# Altium PCB SoM BaseBoard Limbotics Prototype V0PcbDoc.PcbDoc (part 1 of 2)
Units mil, origin at the board's own origin, x right, y up, seen from the top; angles counter-clockwise.
Board outline 5680 x 2228.35 mil, 4 copper layers (Top Layer, GND, PWR, Bottom Layer), stack 61.811 mil thick; 127 components, 192 nets, 673 pads, 249 vias.
Unrouted connection lines stored in the file: 126.
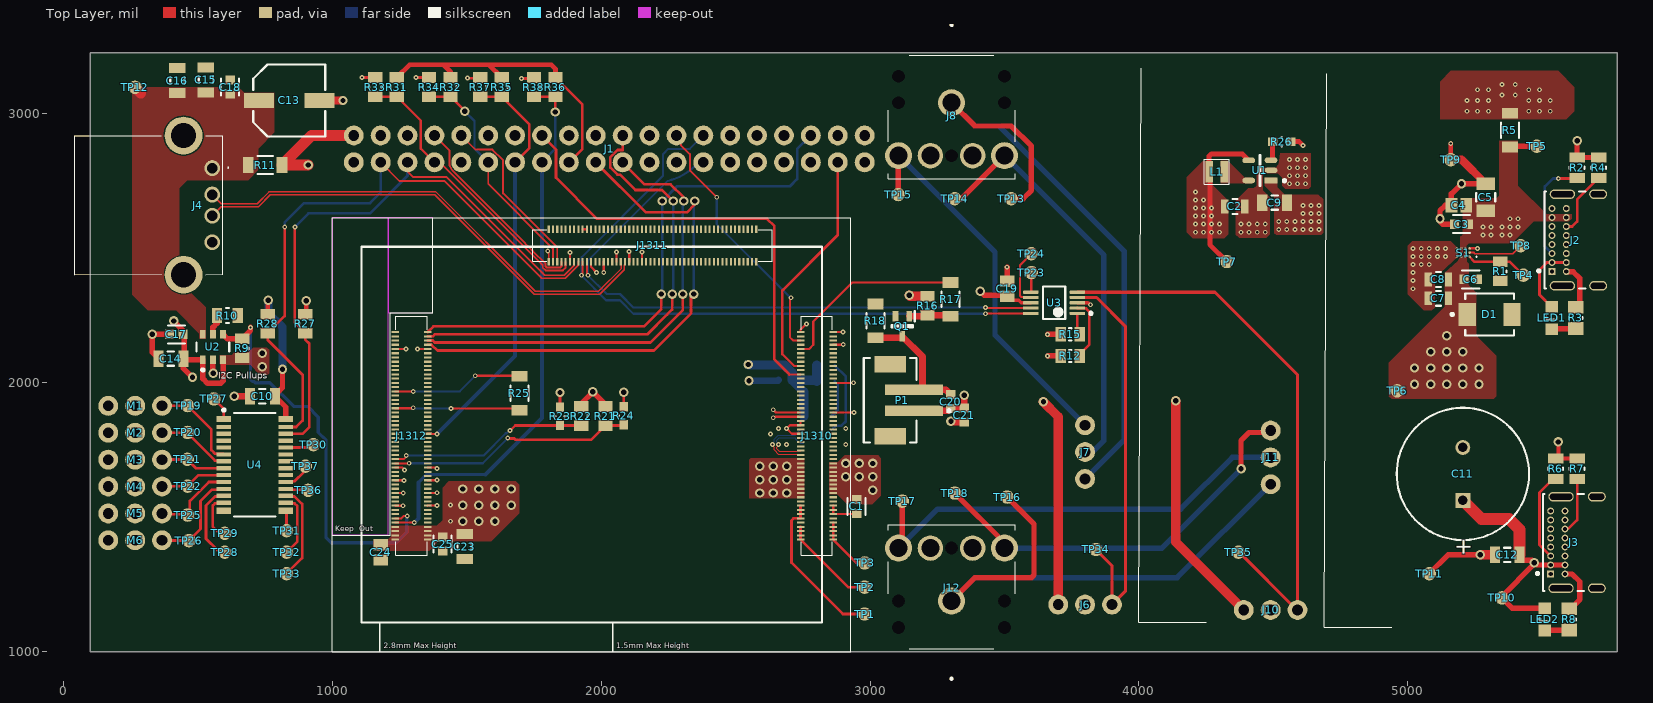
[diagram p0: Top Layer view]
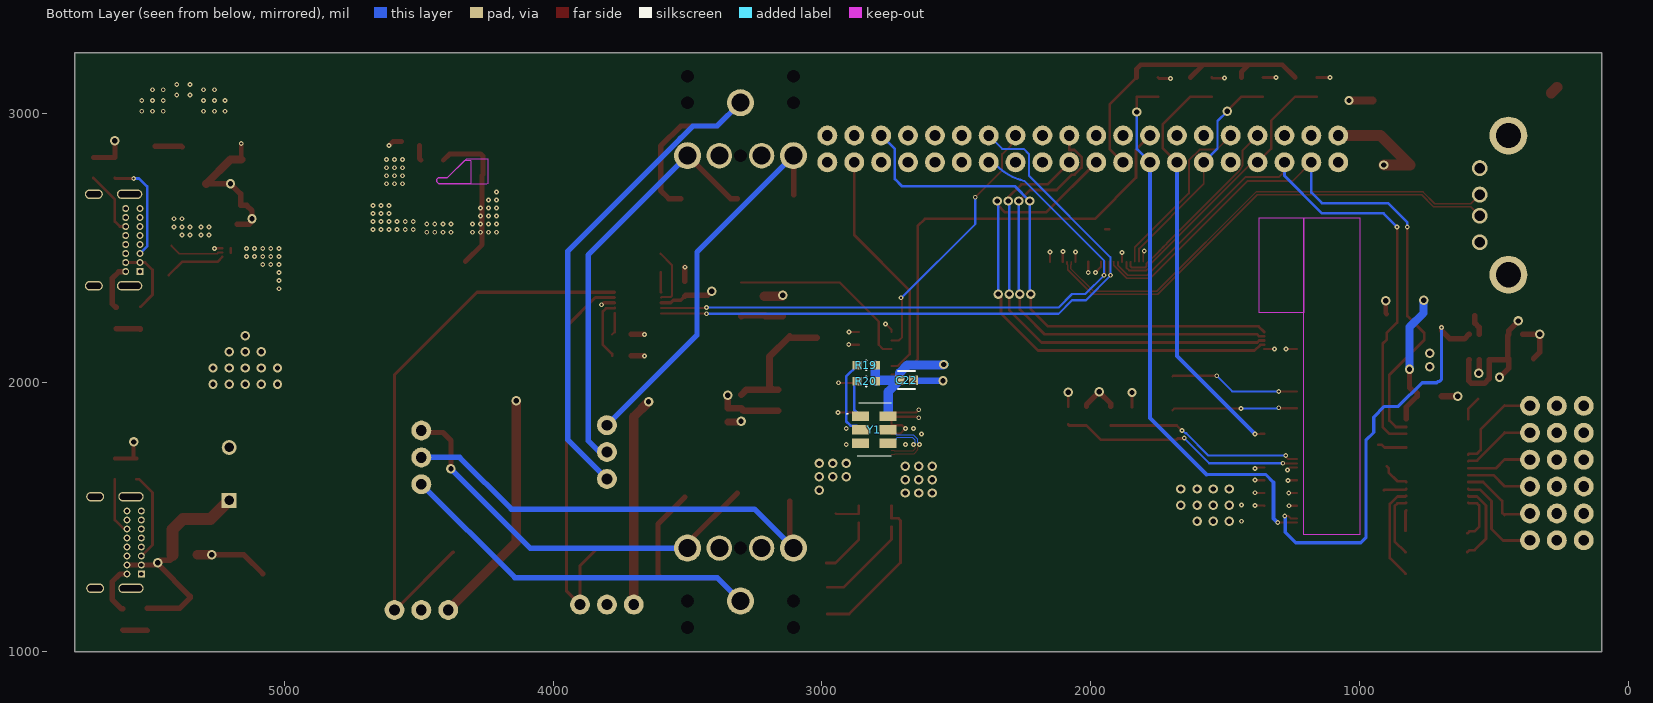
[diagram p1: Bottom Layer view, seen from below]
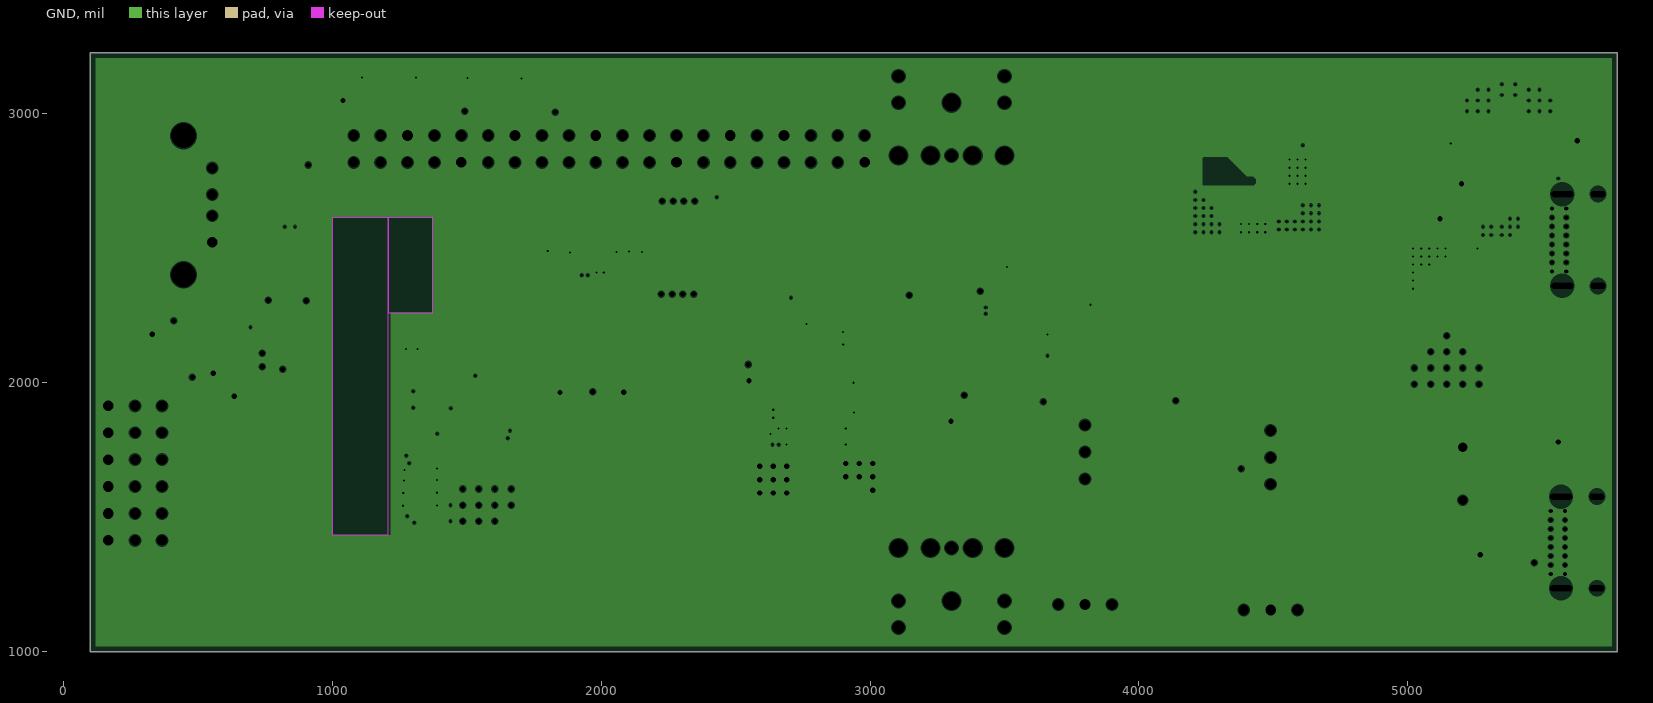
[diagram p2: GND, clearances drawn from the general rule]
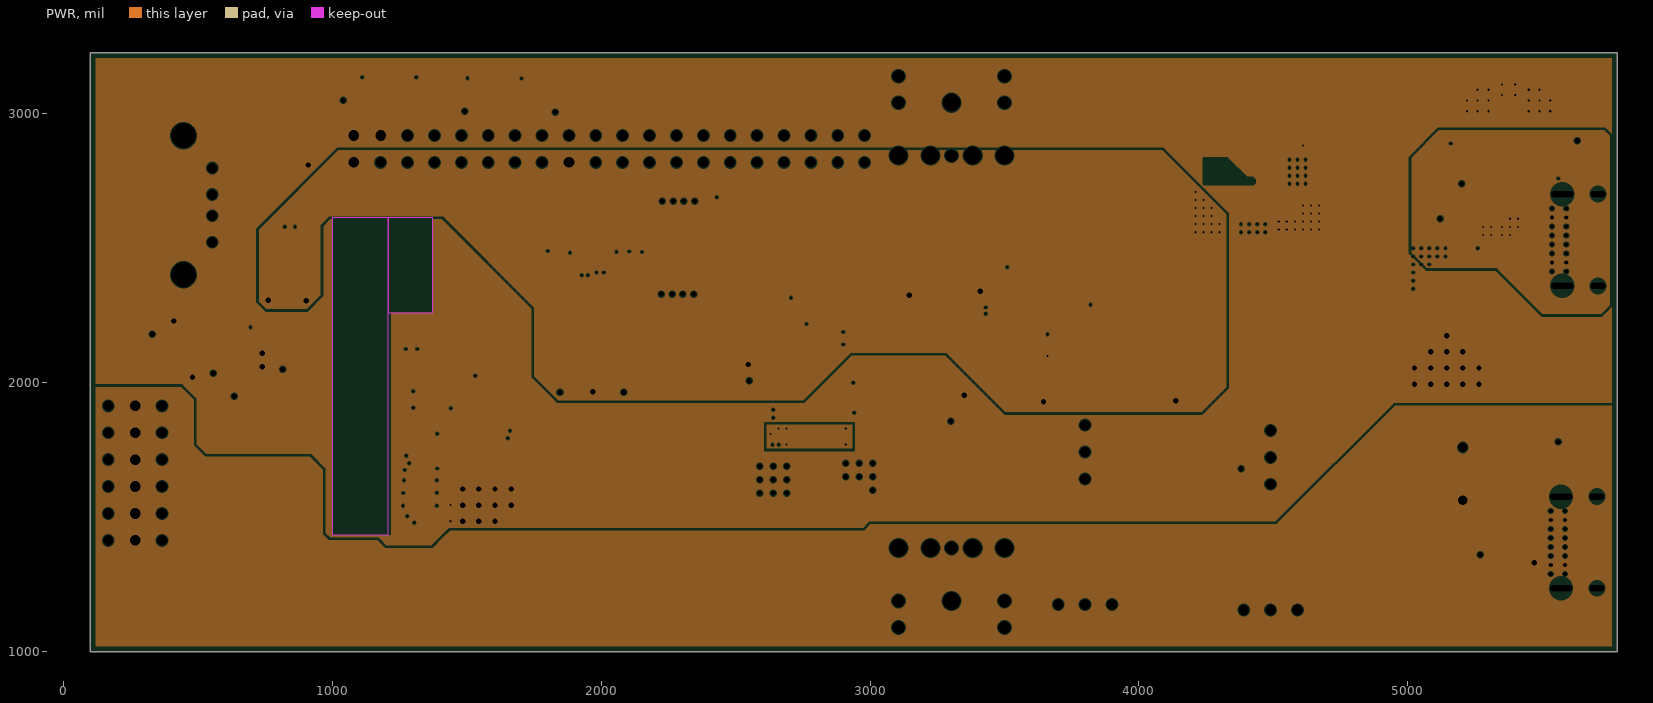
[diagram p3: PWR, clearances drawn from the general rule]
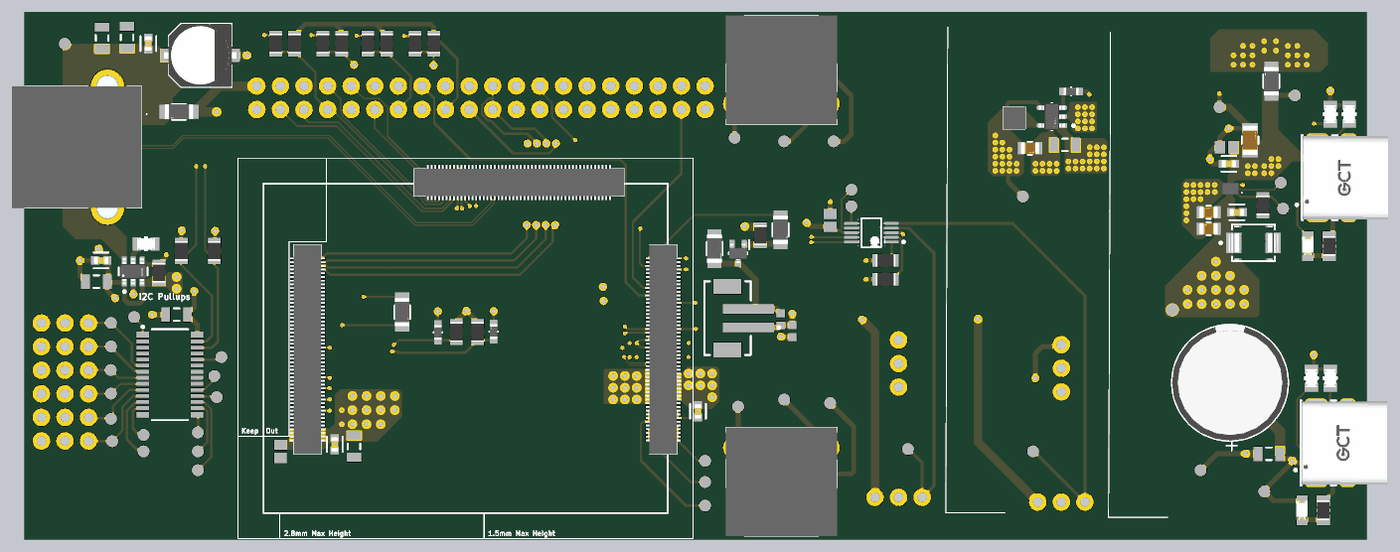
[diagram p5: 3D render of the assembled board from above, using the file's embedded part models]
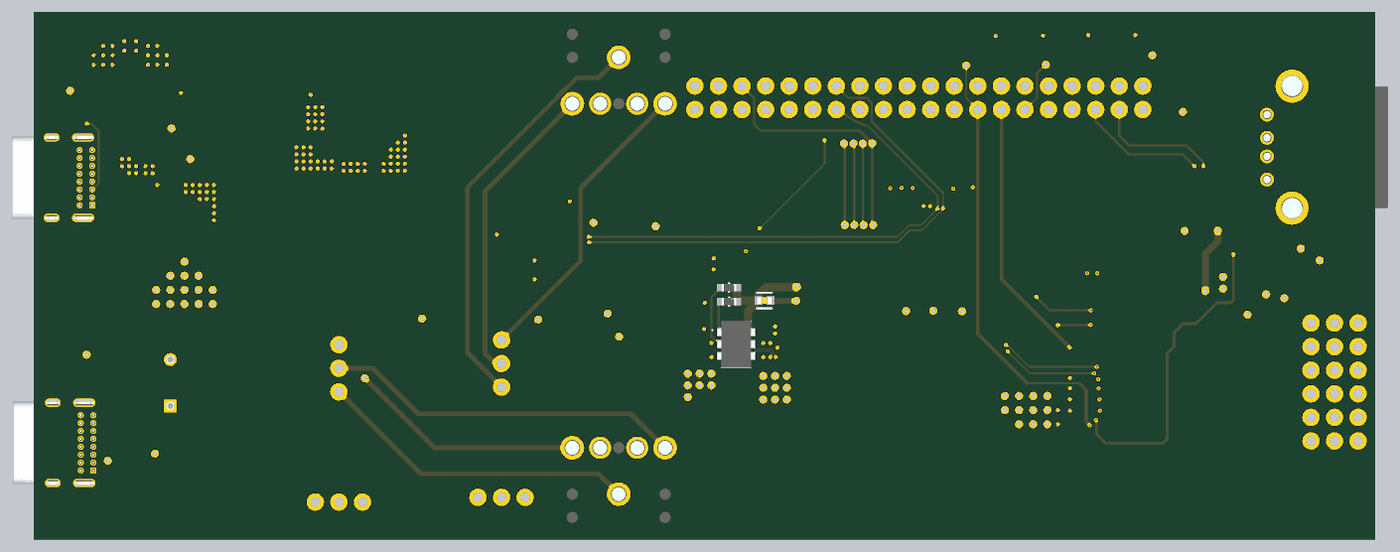
[diagram p6: 3D render of the assembled board from below, using the file's embedded part models]

## Layer stack, top to bottom
Top Solder: solder mask 0.5, Solder Resist, Dk 3.8
Top Layer: signal copper 1.378
Dielectric 1: prepreg 3.937, 2313, Dk 4.05
GND: plane copper 0.689, net GND
Core: core 49.803, FR-4, Dk 4.5
PWR: plane copper 0.689, net (Multiple Nets)
Dielectric 2: prepreg 3.937, 2313, Dk 4.05
Bottom Layer: signal copper 1.378
Bottom Solder: solder mask 0.5, Solder Resist, Dk 3.8

## Board outline
100,1000 5780,1000 5780,3228.35 100,3228.35

## Design rules (kind name [scope] priority, off if disabled: settings)
BoardOutlineClearance [All] p1: gap=7.87 ignorepadtopadclearanceinfootprint=FALSE
Clearance [All] p1: gap=4 ignorepadtopadclearanceinfootprint=FALSE except(5: Arc-Via Track-Via SMDPad-Via THPad-Via Via-Via Via-Fill Via-Poly Via-Region Via-Text; 9.84: Arc-Hole Track-Hole SMDPad-Hole THPad-Hole Via-Hole Fill-Hole Poly-Hole Region-Hole Text-Hole)
ComponentClearance [All] p1: gap=4 collisioncheckmode=3 verticalgap=4 showdistances=TRUE
DiffPairsRouting DiffPairsRouting_1 [InDifferentialPair('HDMI_REFCLK')] p1: maxlimit=5 minlimit=5 mostfreqgap=5 toplayer_minwidth=4.51 toplayer_maxwidth=4.51 toplayer_prefwidth=4.51 bottomlayer_minwidth=4.51 bottomlayer_maxwidth=4.51 bottomlayer_prefwidth=4.51 impedanceprofiledriven=TRUE impedanceprofileid={F7E8DA80-146D-4729-9FA5-0A8441BEC04B} impedanceprofilevalue=100.000000 maxuncoupledlength=500
DiffPairsRouting DiffPairsRouting_USB [InDifferentialPair('USB2_D')] p2: maxlimit=5 minlimit=5 mostfreqgap=5 toplayer_minwidth=5.85 toplayer_maxwidth=5.85 toplayer_prefwidth=5.85 bottomlayer_minwidth=5.85 bottomlayer_maxwidth=5.85 bottomlayer_prefwidth=5.85 impedanceprofiledriven=TRUE impedanceprofileid={8456CD66-69F7-4E08-9A77-33F784F3C630} impedanceprofilevalue=90.000000 maxuncoupledlength=500
DiffPairsRouting [All] p3: maxlimit=4 minlimit=4 mostfreqgap=4 toplayer_minwidth=4 toplayer_maxwidth=71497.94 toplayer_prefwidth=4 bottomlayer_minwidth=4 bottomlayer_maxwidth=71497.94 bottomlayer_prefwidth=4 maxuncoupledlength=500
Height [All] p1: minheight=0 maxheight=71497.94 prefheight=500
HoleSize [All] p1: absolutevalues=TRUE maxlimit=248.03 minlimit=7.87 maxpercent=80.000 minpercent=20.000
HoleToHoleClearance [All] p1: gap=9.84 allowstackedmicrovias=FALSE
MinimumAnnularRing [All] p1: minimumring=3
MinimumSolderMaskSliver [All] p1: minsoldermaskwidth=0
PlaneClearance [All] p1: clearance=4
PlaneConnect PlaneConnectPowerPads [InPadClass('PowerPads')] p1: planeconnectstyle=Direct reliefexpansion=20 reliefentries=4 reliefconductorwidth=10 reliefairgap=10
PlaneConnect [All] p2: pad.planeconnectstyle=Relief pad.reliefexpansion=11.81 pad.reliefentries=4 pad.reliefconductorwidth=4 pad.reliefairgap=4 via.planeconnectstyle=Direct via.reliefexpansion=11.81 via.reliefentries=4 via.reliefconductorwidth=5 via.reliefairgap=5
PolygonConnect PolygonConnect_12 [All vs IsNamedPolygon('3V3 Clock Bottom')] p1: connectstyle=Direct reliefconductorwidth=10 reliefentries=4 polygonreliefangle="90 Angle" airgapwidth=10
PolygonConnect PolygonConnect_11 [All vs IsNamedPolygon('5VSYSFromInput')] p2: connectstyle=Direct reliefconductorwidth=10 reliefentries=4 polygonreliefangle="90 Angle" airgapwidth=10
PolygonConnect PolygonConnect_10 [All vs IsNamedPolygon('5VIN BYPASS')] p3: connectstyle=Direct reliefconductorwidth=10 reliefentries=4 polygonreliefangle="90 Angle" airgapwidth=10
PolygonConnect PolygonConnect_9 [All vs IsNamedPolygon('Top Layer-USB_5V_SoM')] p4: connectstyle=Direct reliefconductorwidth=10 reliefentries=4 polygonreliefangle="90 Angle" airgapwidth=10
PolygonConnect PolygonConnect_8 [All vs IsNamedPolygon('5VIN GND')] p5: connectstyle=Direct reliefconductorwidth=10 reliefentries=4 polygonreliefangle="90 Angle" airgapwidth=10
PolygonConnect PolygonConnect_7 [All vs IsNamedPolygon('USB5V_SOM')] p6: connectstyle=Direct reliefconductorwidth=10 reliefentries=4 polygonreliefangle="90 Angle" airgapwidth=10
PolygonConnect PolygonConnect_6 [All vs IsNamedPolygon('3V3 Out')] p7: connectstyle=Direct reliefconductorwidth=10 reliefentries=4 polygonreliefangle="90 Angle" airgapwidth=10
PolygonConnect PolygonConnect_5 [All vs IsNamedPolygon('3V3 Buck Reg GND')] p8: connectstyle=Direct reliefconductorwidth=10 reliefentries=4 polygonreliefangle="90 Angle" airgapwidth=10
PolygonConnect PolygonConnect_4 [All vs IsNamedPolygon('3V3 Buck Reg Vin-5VSYS')] p9: connectstyle=Direct reliefconductorwidth=10 reliefentries=4 polygonreliefangle="90 Angle" airgapwidth=10
PolygonConnect PolygonConnect_3 [All vs IsNamedPolygon('3V3 Buck Reg Vin-5VSYS')] p10: connectstyle=Direct reliefconductorwidth=10 reliefentries=4 polygonreliefangle="90 Angle" airgapwidth=10
PolygonConnect PolygonConnect_2 [All vs IsNamedPolygon('3V3 Buck Reg GND')] p11: connectstyle=Direct reliefconductorwidth=10 reliefentries=4 polygonreliefangle="90 Angle" airgapwidth=10
PolygonConnect PolygonConnect_1 [All vs IsNamedPolygon('3V3 Switch')] p12: connectstyle=Direct reliefconductorwidth=10 reliefentries=4 polygonreliefangle="90 Angle" airgapwidth=10
PolygonConnect PolygonConnectPowerPads [All vs (InPadClass('PowerPads'))] p13: connectstyle=Direct reliefconductorwidth=10 reliefentries=4 polygonreliefangle="90 Angle" airgapwidth=10
PolygonConnect [All] p14: connectstyle=Direct reliefconductorwidth=4 reliefentries=4 polygonreliefangle="90 Angle" airgapwidth=4
RoutingVias [All] p1: holewidth=7.87 width=17.72 viastyle="Through Hole" minholewidth=7.87 minwidth=17.72 maxholewidth=248.03 maxwidth=257.87
SilkToSilkClearance [All] p1: silktosilkclearance=0
SilkToSolderMaskClearance [IsPad] p1: minsilkscreentomaskgap=4 clearancetoexposedcopper=TRUE
SolderMaskExpansion [All] p1: expansion=2.95 istentingtop=FALSE
Width [All] p1: maxlimit=71497.94 minlimit=4 preferedwidth=10
20 further rules are at their usual default settings.

## Classes and differential pairs
component class "SoM - PullUp PullDown": R31 R32 R33 R34 R35 R36 R37 R38
component class SoM: C1 C20 C21 C22 C23 C24 C25 J1 J1310 J1311 J1312 P1 Q1 R16 R17 R18 R19 R20 R21 R22 R23 R24 R25 TP1 TP2 TP3 Y1
component class Power: C2 C3 C4 C5 C6 C7 C8 C9 C11 C12 D1 J2 J3 L1 LED1 LED2 R1 R2 R3 R4 R5 R6 R7 R8 R26 S1 TP4 TP5 TP6 TP7 TP8 TP9 TP10 TP11 U1
component class "Peripherals - USB": C13 C14 C15 C16 C17 C18 J4 R9 R10 R11 TP12 U2
component class "Peripherals - Servos": C10 M1 M2 M3 M4 M5 M6 R27 R28 TP19 TP20 TP21 TP22 TP25 TP26 TP27 TP28 TP29 TP30 TP31 TP32 TP33 TP36 TP37 U4
component class "Peripherals - MyoSensor": C19 J6 J7 J8 J10 J11 J12 R12 R15 TP13 TP14 TP15 TP16 TP17 TP18 TP23 TP24 TP34 TP35 U3
differential pair USB2_D: +USB2_D_P -USB2_D_N
differential pair HDMI_REFCLK: +HDMI_REFCLK_P -HDMI_REFCLK_N

## Components (designator, comment, footprint, x,y, rotation, side; value= is the part's Value field where it differs from the comment)
C1 "0.1uF" FP-C0603-CJ-MFG 2950,1540 r90 top value=100nF
C2 "22uF" FP-GRM21B-0_15-MFG 4357,2656 r0 top
C3 "0.1uF" FP-C0603-CJ-MFG 5200,2590 r180 top value=100nF
C4 "1uF" CAPC2013X145X50LL20T25 5190,2660 r0 top
C5 "47uF" FP-GRM31C-0_2-e0_3_0_8-IPC_C 5290,2690 r90 top
C6 "0.1uF" FP-C0603-CJ-MFG 5234.25,2384.25 r0 top value=100nF
C7 "22uF" FP-GRM21B-0_15-MFG 5114.25,2314.25 r180 top
C8 "22uF" FP-GRM21B-0_15-MFG 5114.25,2384.25 r180 top
C9 "10uF" CAPC2013X145X20ML20 4505,2670 r0 top
C10 "10uF" CAPC2013X145X20ML20 740,1950 r0 top
C11 "100uF * n" CAPPR65-500-2000X1250X2200 5205,1661.06 r90 top
C12 "10uF" CAPC2013X145X20ML20 5370,1360 r0 top
C13 "100uF" PNSC-EEEFK1C101P_L 840,3050 r0 top
C14 "10uF" CAPC2013X145X20ML20 400,2090 r0 top
C15 "10uF" CAPC2013X145X20ML20 530,3126.26 r270 top
C16 "10uF" CAPC2013X145X20ML20 423.86,3123.9 r270 top
C17 "0.1uF" FP-C0603-CJ-MFG 420,2180 r180 top value=100nF
C18 "0.1uF" FP-C0603-CJ-MFG 620,3100 r90 top value=100nF
C19 "1uF" CAPC2013X145X50LL20T25 3510,2350 r270 top
C20 "1nF 0603" CAPC1608X90X35LL15T15 3300,1930 r270 top
C21 "1nF 0603" CAPC1608X90X35LL15T15 3350,1880 r270 top
C22 "0.1uF" FP-C0603-CJ-MFG 2685,2010 r0 bottom value=100nF
C23 "10uF" CAPC2013X145X20ML20 1492,1391 r90 top
C24 "1uF" CAPC2013X145X50LL20T25 1180,1370 r90 top
C25 "0.1uF" FP-C0603-CJ-MFG 1410,1400 r90 top value=100nF
D1 "SMBJ5.0A-TR" FP-SMB-MFG 5304.25,2254.25 r0 top
J1 "210-P92-20GBEG" 2X20 1080,2820 r0 top locked
J2 "USB4085-GF-A" FP-USB4085-GF-A-MFG 5695,2531.06 r90 top
J3 "USB4085-GF-A" FP-USB4085-GF-A-MFG 5690,1406.06 r90 top
J4 "87520-0010BLF" 875200010BLF 553.54,2798.43 r270 top
J6 "0.1 1x3 Header" 1X03 3900,1175 r180 top
J7 "0.1 1x3 Header" 1X03 3800,1842.5 r270 top
J8 "SJ1-3523N" SJ13523N 3303.15,3218.74 r270 top
J10 "0.1 1x3 Header" 1X03 4590,1155 r180 top
J11 "0.1 1x3 Header" 1X03 4490,1822.5 r270 top
J12 "SJ1-3523N" SJ13523N 3303.15,1011.26 r90 top
J1310 "DF40HC(3.0)-100DS-0.4V(51)" DF40HC30100DS04V51 2802.36,1802.76 r90 top locked
J1311 "DF40HC(3.0)-100DS-0.4V(51)" DF40HC30100DS04V51 2190.94,2510.63 r0 top locked
J1312 "DF40HC(3.0)-100DS-0.4V(51)" DF40HC30100DS04V51 1294.49,1802.76 r90 top locked
L1 "2.2uH 1.7A" NRH2412T2R2MNGH 4289.6,2784.85 r180 top
LED1 "redLED" 0805_A 5535,2241.06 r90 top
LED2 "greenLED" 0805_A 5510,1120 r90 top
M1 "Servo Motor" 1X03 366.83,1914.17 r180 top
M2 "Servo Motor" 1X03 366.83,1814.17 r180 top
M3 "Servo Motor" 1X03 366.83,1714.17 r180 top
M4 "Servo Motor" 1X03 366.83,1614.17 r180 top
M5 "Servo Motor" 1X03 366.83,1514.17 r180 top
M6 "Servo Motor" 1X03 366.83,1414.17 r180 top
P1 "B2B-PH-SM4-TB(LF)(SN)" JST-B2B-PH-SM4-TB-2_V 3075,1935 r270 top
Q1 "PMF250XNEX" SOT65P210X110-3N 3120,2210 r270 top
R1 "10kR" RESC2013X60X35NL10T20 5344.25,2414.25 r270 top
R2 "5.1kR" FP-CRCW0805-e3-MFG 5630,2800 r270 top
R3 "10kR" RESC2013X60X35ML10T20 5625,2241.06 r270 top
R4 "5.1kR" FP-CRCW0805-e3-MFG 5710,2800 r270 top
R5 "DNP 0R" FP-RC1206-MFG 5380,2940 r90 top value=0Ω
R6 "5.1kR" FP-CRCW0805-e3-MFG 5550,1680 r270 top
R7 "5.1kR" FP-CRCW0805-e3-MFG 5630,1680 r270 top
R8 "10kR" RESC2013X60X35ML10T20 5600,1120 r270 top
R9 "10kR" RESC2013X60X35NL10T20 665,2127.83 r270 top
R10 "20kR" FP-CRCW0805-e3-MFG 610,2250 r180 top
R11 "DNP 0R" FP-RC1206-MFG 750,2810 r180 top value=0Ω
R12 "10kR" RESC2013X60X35NL10T20 3745,2100 r180 top
R15 "10kR" RESC2013X60X35NL10T20 3745,2180 r0 top
R16 "10kR" RESC2013X60X35NL10T20 3214.01,2287.03 r270 top
R17 "0R" FP-RC1206-MFG 3300,2310 r270 top value=0Ω
R18 "DNP 0R" FP-RC1206-MFG 3020,2230 r270 top value=0Ω
R19 "100kR" FP-RC0603-0_55-MFG 2835,2065 r180 bottom
R20 "100kR" FP-RC0603-0_55-MFG 2835,2005 r180 bottom
R21 "10kR DNP" RESC2013X60X35NL10T20 2016,1876.43 r270 top
R22 "10kR" RESC2013X60X35NL10T20 1926,1876.43 r270 top
R23 "100kR DNP" FP-RC0603-0_55-MFG 1847,1875 r90 top
R24 "100kR DNP" FP-RC0603-0_55-MFG 2084,1878 r90 top
R25 "0R" FP-RC1206-MFG 1696,1961 r270 top value=0Ω
R26 "100kR" FP-RC0603-0_55-MFG 4531,2897 r0 top
R27 "10kR_DNP" RESC2013X60X35NL10T20 900,2220 r270 top
R28 "10kR_DNP" RESC2013X60X35NL10T20 760,2220 r270 top
R31 "DNP 10kR" RESC2013X60X35NL10T20 1240,3100 r270 top
R32 "DNP 10kR" RESC2013X60X35NL10T20 1440,3100 r270 top
R33 "DNP 10kR" RESC2013X60X35NL10T20 1160,3100 r90 top
R34 "DNP 10kR" RESC2013X60X35NL10T20 1360,3100 r90 top
R35 "DNP 10kR" RESC2013X60X35NL10T20 1630,3100 r270 top
R36 "DNP 10kR" RESC2013X60X35NL10T20 1830,3100 r270 top
R37 "DNP 10kR" RESC2013X60X35NL10T20 1550,3100 r90 top
R38 "DNP 10kR" RESC2013X60X35NL10T20 1750,3100 r90 top
S1 "KTS1681AEUZ-TR" KTS1681AEUZTR 5230,2468.5 r180 top
TP1 "TestPad" TestPad50mil 2980,1140 r270 top
TP2 "TestPad" TestPad50mil 2980,1240 r270 top
TP3 "TestPad" TestPad50mil 2980,1330 r90 top
TP4 "TestPad" TestPad50mil 5430,2400 r270 top
TP5 "TestPad" TestPad50mil 5480,2880 r270 top
TP6 "TestPad" TestPad50mil 4960.58,1970.21 r270 top
TP7 "TestPad" TestPad50mil 4327,2451 r180 top
TP8 "TestPad" TestPad50mil 5420,2510 r270 top
TP9 "TestPad" TestPad50mil 5160,2830 r180 top
TP10 "TestPad" TestPad50mil 5350,1200 r180 top
TP11 "TestPad" TestPad50mil 5080,1290 r180 top
TP12 "TestPad" TestPad50mil 266,3099 r270 top
TP13 "TestPad" TestPad50mil 3525,2685 r180 top
TP14 "TestPad" TestPad50mil 3315,2685 r180 top
TP15 "TestPad" TestPad50mil 3105,2700 r180 top
TP16 "TestPad" TestPad50mil 3510,1575 r180 top
TP17 "TestPad" TestPad50mil 3120,1560 r180 top
TP18 "TestPad" TestPad50mil 3315,1590 r180 top
TP19 "TestPad" TestPad50mil 461.83,1915.24 r180 top
TP20 "TestPad" TestPad50mil 461.83,1815.24 r180 top
TP21 "TestPad" TestPad50mil 460.83,1715.24 r180 top
TP22 "TestPad" TestPad50mil 461.83,1615.24 r180 top
TP23 "TestPad" TestPad50mil 3600,2410 r180 top
TP24 "TestPad" TestPad50mil 3600,2480 r180 top
TP25 "TestPad" TestPad50mil 461.83,1508.11 r90 top
TP26 "TestPad" TestPad50mil 466.83,1413.11 r90 top
TP27 "TestPad" TestPad50mil 560,1940 r90 top
TP28 "TestPad" TestPad50mil 600,1370 r90 top
TP29 "TestPad" TestPad50mil 600,1440 r90 top
TP30 "TestPad" TestPad50mil 930,1770 r90 top
TP31 "TestPad" TestPad50mil 830,1450 r90 top
TP32 "TestPad" TestPad50mil 830,1370 r90 top
TP33 "TestPad" TestPad50mil 830,1290 r90 top
TP34 "TestPad" TestPad50mil 3840,1380 r270 top
TP35 "TestPad" TestPad50mil 4370,1370 r270 top
TP36 "TestPad" TestPad50mil 910,1600 r90 top
TP37 "TestPad" TestPad50mil 900,1690 r90 top
U1 "LM3671MF-3.3/NOPB" FP-DBV0005A-IPC_C 4450,2790 r180 top
U2 "AP22653W6-7" FP-SOT26-MFG 555.91,2133.4 r90 top
U3 "ADS1015IDGST" FP-DGS0010A-MFG 3684.69,2297.6 r180 top
U4 "PCA9685PW,112" SOT361-1_V 711.82,1695 r0 top
Y1 "NX5427001Z" NX5427001Z 2805,1825 r270 bottom

## Footprints (in the part's own frame and the unit in brackets; to place one, negate y for a bottom-side part, rotate by r counter-clockwise, add the part's x,y. Pads: shape width x height; smd on the part's side, far side on the other; paste and mask are expansions set on the pad)
1X03 [mil]
  round 74 hole 40: 1(0,0) 2(100,0) 3(200,0)
2X20 [mil]
  round 74 hole 40: 1(0,0) 2(0,100) 3(100,0) 4(100,100) 5(200,0) 6(200,100) 7(300,0) 8(300,100) 9(400,0) 10(400,100) 11(500,0) 12(500,100) 13(600,0) 14(600,100) 15(700,0) 16(700,100) 17(800,0) 18(800,100) 19(900,0) 20(900,100) 21(1000,0) 22(1000,100) 23(1100,0) 24(1100,100) 25(1200,0) 26(1200,100) 27(1300,0) 28(1300,100) 29(1400,0) 30(1400,100) 31(1500,0) 32(1500,100) 33(1600,0) 34(1600,100) 35(1700,0) 36(1700,100) 37(1800,0) 38(1800,100) 39(1900,0) 40(1900,100)
0805_A [mm] "Chip LED, 2-Leads, Body 2.0x1.3mm, IPC Medium Density"
  rect 1.1x1.2 smd: 1(-1.05,0) 2(1.05,0)
  silkscreen extent -0.15,-0.5 0.15,0.5, body extent -1,-0.62 1,0.63, height 0.68
875200010BLF [mm]
  round 1.5 hole 1: 1(0,0) 2(2.5,0) 3(4.5,0) 4(7,0)
  round 3.57 hole 2.38: MH1(-3.07,-2.71) MH2(10.07,-2.71)
  silkscreen extent -3.05,-13.01 10.07,1.55, body extent -4.15,-13.01 11.16,0.99, height 7.9
CAPC1608X90X35LL15T15 [mm] "Chip Capacitor, 2-Leads, Body 1.60x0.81mm, IPC High Density"
  rect 0.85x0.9 smd: 1(-0.65,0) 2(0.65,0)
  body extent -0.88,-0.48 0.87,0.48, height 0.9
CAPC2013X145X20ML20 [mm] "Chip Capacitor, 2-Leads, Body 2.20x1.45mm, IPC Low Density"
  rect 0.95x1.55 smd: 1(-1.175,0) 2(1.175,0)
  silkscreen extent -0.3,-0.67 0.3,0.67, body extent -1.1,-0.72 1.1,0.72, height 1.45
CAPC2013X145X50LL20T25 [mm] "Chip Capacitor, 2-Leads, Body 2.00x1.25mm, IPC High Density"
  rect 1.1x1.35 smd: 1(-0.7,0) 2(0.7,0)
  body extent -1.1,-0.72 1.1,0.72, height 1.45
CAPPR65-500-2000X1250X2200 [mm] "THD, 2-Leads, Dia 12.5mm, Body Length 20mm"
  rect 1.4x1.4 hole 0.9: 1(-2.5,0)
  round 1.4 hole 0.9: 2(2.5,0)
  silkscreen extent -6.25,-6.25 6.25,6.25, body extent -6.25,-6.25 6.26,6.25, height 22.01
DF40HC30100DS04V51 [mm]
  rect 0.2x0.7 smd: 1(9.8,-1.54) 2(9.8,1.54) 3(9.4,-1.54) 4(9.4,1.54) 5(9,-1.54) 6(9,1.54) 7(8.6,-1.54) 8(8.6,1.54) 9(8.2,-1.54) 10(8.2,1.54) 11(7.8,-1.54) 12(7.8,1.54) 13(7.4,-1.54) 14(7.4,1.54) 15(7,-1.54) 16(7,1.54) 17(6.6,-1.54) 18(6.6,1.54) 19(6.2,-1.54) 20(6.2,1.54) 21(5.8,-1.54) 22(5.8,1.54) 23(5.4,-1.54) 24(5.4,1.54) 25(5,-1.54) 26(5,1.54) 27(4.6,-1.54) 28(4.6,1.54) 29(4.2,-1.54) 30(4.2,1.54) 31(3.8,-1.54) 32(3.8,1.54) 33(3.4,-1.54) 34(3.4,1.54) 35(3,-1.54) 36(3,1.54) 37(2.6,-1.54) 38(2.6,1.54) 39(2.2,-1.54) 40(2.2,1.54) 41(1.8,-1.54) 42(1.8,1.54) 43(1.4,-1.54) 44(1.4,1.54) 45(1,-1.54) 46(1,1.54) 47(0.6,-1.54) 48(0.6,1.54) 49(0.2,-1.54) 50(0.2,1.54) 51(-0.2,-1.54) 52(-0.2,1.54) 53(-0.6,-1.54) 54(-0.6,1.54) 55(-1,-1.54) 56(-1,1.54) 57(-1.4,-1.54) 58(-1.4,1.54) 59(-1.8,-1.54) 60(-1.8,1.54) 61(-2.2,-1.54) 62(-2.2,1.54) 63(-2.6,-1.54) 64(-2.6,1.54) 65(-3,-1.54) 66(-3,1.54) 67(-3.4,-1.54) 68(-3.4,1.54) 69(-3.8,-1.54) 70(-3.8,1.54) 71(-4.2,-1.54) 72(-4.2,1.54) 73(-4.6,-1.54) 74(-4.6,1.54) 75(-5,-1.54) 76(-5,1.54) 77(-5.4,-1.54) 78(-5.4,1.54) 79(-5.8,-1.54) 80(-5.8,1.54) 81(-6.2,-1.54) 82(-6.2,1.54) 83(-6.6,-1.54) 84(-6.6,1.54) 85(-7,-1.54) 86(-7,1.54) 87(-7.4,-1.54) 88(-7.4,1.54) 89(-7.8,-1.54) 90(-7.8,1.54) 91(-8.2,-1.54) 92(-8.2,1.54) 93(-8.6,-1.54) 94(-8.6,1.54) 95(-9,-1.54) 96(-9,1.54) 97(-9.4,-1.54) 98(-9.4,1.54) 99(-9.8,-1.54) 100(-9.8,1.54)
  silkscreen extent -11.3,-1.47 11.3,1.47, body extent -11.3,-1.87 11.3,1.87, height 3.15
FP-C0603-CJ-MFG [mm]
  rect 0.85x0.9 smd paste+0 mask+0: 1(-0.65,0) 2(0.65,0)
  silkscreen extent -0.8,-0.85 0.8,0.85, body extent -1.2,-0.6 1.2,0.6, height 0.25
FP-CRCW0805-e3-MFG [mm]
  rect 0.95x1.45 smd paste+0 mask+0: 1(-0.975,0) 2(0.975,0)
  silkscreen extent -0.13,-0.7 0.13,0.7, body extent -1.55,-0.82 1.55,0.82, height 0.25
FP-DBV0005A-IPC_C [mm]
  rect 1.205x0.532 smd paste+0 mask+0: 1(-1.05,0.95)
  rrect100% 1.205x0.532 smd paste+0 mask+0: 2(-1.05,0) 3(-1.05,-0.95) 4(1.05,-0.95) 5(1.05,0.95)
  silkscreen extent -2.45,-1.45 0.05,1.45, body extent -1.75,-1.55 1.75,1.55, height 0.25
FP-DGS0010A-MFG [mm]
  rrect33% 1.45x0.3 smd paste+0 mask+0: 1(-2.2,1) 2(-2.2,0.5) 3(-2.2,0) 4(-2.2,-0.5) 5(-2.2,-1) 6(2.2,-1) 7(2.2,-0.5) 8(2.2,0) 9(2.2,0.5) 10(2.2,1)
  silkscreen extent -3.6,-1.55 1.05,1.55, body extent -3.03,-1.8 3.03,1.8, height 0.25
FP-GRM21B-0_15-MFG [mm]
  rect 0.7x1.3 smd paste+0 mask+0: 1(-0.95,0) 2(0.95,0)
  silkscreen extent -0.23,-0.7 0.23,0.7, body extent -1.4,-0.8 1.4,0.8, height 0.25
FP-GRM31C-0_2-e0_3_0_8-IPC_C [mil]
  rect 45.46x67.17 smd paste+0 mask+0: 1(-50.23,0) 2(50.23,0)
  silkscreen extent -16,-35 16,35, body extent -77,-39 77,39, height 10
FP-RC0603-0_55-MFG [mm]
  rect 0.9x0.8 smd paste+0 mask+0: 1(-0.85,0) 2(0.85,0)
  silkscreen extent -0.03,-0.45 0.03,0.45, body extent -0.8,-0.4 0.8,0.4, height 0.55
FP-RC1206-MFG [mm]
  rect 1x1.5 smd paste+0 mask+0: 1(-1.6,0) 2(1.6,0)
  silkscreen extent -0.72,-0.85 0.72,0.85, body extent -2.2,-0.95 2.2,0.95, height 0.25
FP-SMB-MFG [mm]
  rect 1.62x2.18 smd paste+0 mask+0: 1(-2.11,0) 2(2.11,0)
  silkscreen extent -3.65,-1.97 2.3,1.97, body extent -3.02,-2.07 3.02,2.07, height 0.25
FP-SOT26-MFG [mm]
  rect 0.8x0.55 smd paste+0 mask+0: 1(-1.2,0.95) 2(-1.2,0) 3(-1.2,-0.95) 4(1.2,-0.95) 5(1.2,0) 6(1.2,0.95)
  silkscreen extent -2.3,-1.55 0.43,1.55, body extent -1.7,-1.65 1.7,1.65, height 0.25
FP-USB4085-GF-A-MFG [mm]
  rrect100% 0.9x2.4 hole 2.1 slot 0.6 at 0 deg paste-1000 mask+0: 1(-4.325,3.045) 2(4.325,3.045)
  rrect100% 0.9x1.7 hole 1.4 slot 0.6 at 0 deg paste-1000 mask+0: 3(-4.325,-0.335) 4(4.325,-0.335)
  rect 0.65x0.65 hole 0.4 paste-1000 mask+0: A1(-2.975,4.025)
  round 0.65 hole 0.4 paste-1000 mask+0: A4(-2.125,4.025) A5(-1.275,4.025) A6(-0.425,4.025) A7(0.425,4.025) A8(1.275,4.025) A9(2.125,4.025) A12(2.975,4.025) B1(2.975,2.675) B4(2.125,2.675) B5(1.275,2.675) B6(0.425,2.675) B7(-0.425,2.675) B8(-1.275,2.675) B9(-2.125,2.675) B12(-2.975,2.675)
  silkscreen extent -4.57,0.89 4.57,5.39, body extent -4.87,-4.83 4.87,4.83, height 0.25
JST-B2B-PH-SM4-TB-2_V [mm] "SMD, 2-Leads, Body 7.95x5mm, Pitch 2mm"
  rect 1x5.5 smd: 1(1,2.25) 2(-1,2.25)
  rect 1.6x3 smd: MP1(3.4,0) MP2(-3.4,0)
  silkscreen extent -3.98,-2.5 3.98,5.68, body extent -3.97,-2.5 3.97,4.5, height 6.6
KTS1681AEUZTR [mm]
  round 0.225 smd: A1(0,0) A2(0.4,0) A3(0.8,0) A4(1.2,0) B1(0,-0.4) B2(0.4,-0.4) B3(0.8,-0.4) B4(1.2,-0.4) C1(0,-0.8) C2(0.4,-0.8) C3(0.8,-0.8) C4(1.2,-0.8)
  silkscreen extent -0.7,-0.05 -0.6,0.05, body extent -0.25,-1.01 1.45,0.21, height 0.76
NRH2412T2R2MNGH [mm]
  rect 0.7x2 smd: 1(-0.725,0) 2(0.725,0)
  silkscreen extent -1.2,-1.2 1.2,1.2, body extent -1.2,-1.2 1.2,1.2, height 1.1
NX5427001Z [mm]
  rect 0.89x1.6 smd: 1(-1.27,-1.3) 2(0,-1.3) 3(1.27,-1.3) 4(1.27,1.3) 5(0,1.3) 6(-1.27,1.3)
  silkscreen extent -2.5,-2.6 2.5,1.6, body extent -2.5,-2.01 2.5,2.01, height 1.45
PNSC-EEEFK1C101P_L [mm] "Aluminum Electrolytic Capacitor, Body 6.8x6.8mm, IPC High Density"
  rect 2.85x1.4 smd: 1(-2.85,0) 2(2.85,0)
  silkscreen extent -3.4,-3.4 3.4,3.4, body extent -3.9,-3.4 3.9,3.4, height 6.3
RESC2013X60X35ML10T20 [mm] "Chip Resistor, 2-Leads, Body 2.1x1.35mm, IPC Low Density"
  rect 1.2x1.45 smd: 1(-1,0) 2(1,0)
  silkscreen extent -0.1,-0.63 0.1,0.63, body extent -1.05,-0.68 1.05,0.67, height 0.6
RESC2013X60X35NL10T20 [mm] "Chip Resistor, 2-Leads, Body 2.1x1.35mm, IPC Medium Density"
  rect 1x1.35 smd: 1(-0.9,0) 2(0.9,0)
  silkscreen extent -0.1,-0.58 0.1,0.58, body extent -1.05,-0.68 1.05,0.67, height 0.6
SJ13523N [mm]
  round 2.55 hole 1.7: 1(4.5,0) 2(9.5,-5) 3(9.5,5)
  round 2.4 hole 1.7: 10(9.5,-2) 11(9.5,2)
  round 0.6 hole 1.2 unplated: MH1(2,5) MH2(4.5,5) MH3(9.5,0) MH4(2,-5) MH5(4.5,-5)
  silkscreen extent -2.95,-6 11.7,6, body extent 0,-6 11.7,6, height 5.6
SOT65P210X110-3N [mm]
  rect 1x0.55 smd: 1(-0.95,0.65) 2(-0.95,-0.65) 3(0.95,0)
  silkscreen extent -1.45,-1 0.1,1.17, body extent -1.05,-1 1.05,1, height 1.1
SOT361-1_V [mm] "SOP, 28-Leads, Body 9.7x4.4mm, Pitch 0.65mm, NXP Recommended"
  rect 1.35x0.6 smd: 1(-2.925,4.325) 14(-2.925,-4.325) 15(2.925,-4.325) 28(2.925,4.325)
  rect 1.35x0.4 smd: 2(-2.925,3.575) 3(-2.925,2.925) 4(-2.925,2.275) 5(-2.925,1.625) 6(-2.925,0.975) 7(-2.925,0.325) 8(-2.925,-0.325) 9(-2.925,-0.975) 10(-2.925,-1.625) 11(-2.925,-2.275) 12(-2.925,-2.925) 13(-2.925,-3.575) 16(2.925,-3.575) 17(2.925,-2.925) 18(2.925,-2.275) 19(2.925,-1.625) 20(2.925,-0.975) 21(2.925,-0.325) 22(2.925,0.325) 23(2.925,0.975) 24(2.925,1.625) 25(2.925,2.275) 26(2.925,2.925) 27(2.925,3.575)
  silkscreen extent -3.05,-4.9 1.96,5.3, body extent -2.2,-4.85 2.2,4.85, height 1.1
TestPad50mil [mil]
  round 50 smd: 1(0,0)

## Part data
C1 C3 C6 C17 C18 C22 C25: library part CMP-2006-03300-2, "C0603X104K5RACTU CAP CER 0.1UF 50V X7R 0603", Capacitance=100nF, Manufacturer=Kemet, Manufacturer Part Number=C0603X104K5RACTU, Package=C0603-CJ, Temperature="-55°C to +125°C", Temperature Characteristic=X7R, Temperature Coefficient=15%, Temperature Range High=+125°C, Temperature Range Low=-55°C, Tolerance=10%, Voltage=50V, Automotive=No, Category=Cap, ComponentLink2Description=Datasheet, ComponentLink2URL=https://content.kemet.com/datasheets/KEM_C1013_X7R_FT-CAP_SMD.pdf, Device Class L1="Passive Components", Device Class L2=Capacitors, Device Class L3="Ceramic Capacitors", Digikey Description="CAP CER 0.1UF 50V X7R 0603", Height=0.95mm, Ipc Land Pattern Name=CAPC16080X80, Lead Free=Yes, Material=Ceramic, Mouser Description="Capacitor; Ceramic; Cap 0.1uF; Tol+10%; SMT; Flexible Termination; Vol-Rtg 50V; TR", Octopart=https://octopart.com/c0603x104k5ractu-kemet-9145062, RoHS=TRUE, Voltage Rating=50V
C2 C7 C8: library part CMP-2007-03385-2, "GRM21BR60J226ME39L Chip Multilayer Ceramic Capacitors for General Purpose, 0805, 22uF, X5R, 15%, 20%, 6.3V", Case Code (Imperial)=0805, Case Code (Metric)=2012, Dielectric=X5R, Max Operating Temperature=85°C, Min Operating Temperature=-55°C, Package Quantity=1, Tolerance=20%, Voltage=6.3V, Capacitance=22uF, Case/Package=0805, Depth=1.25mm, Height=1.25mm, Lead Free="Lead Free", Length=2mm, Material=Ceramic, Mount="Surface Mount", Packaging="Tape and Reel", Radiation Hardening=No, REACH SVHC="No SVHC", Termination=SMD/SMT, Thickness=0.053inch, Voltage Rating=6.3V, Voltage Rating (DC)=6.3V, Width=0.049inch
C4 C19 C24: library part CMP-1036-04746-2, "C0805C105K4PACTU", Manufacturer=Kemet, Part Number=C0805C105K4PACTU
C5: library part CMP-2000-06344-2, "GRM31CR60J476ME19L Chip Multilayer Ceramic Capacitors for General Purpose, 1206, 47uF, X5R, 15%, 20%, 6.3V", Case Code (Imperial)=1206, Case Code (Metric)=3216, Dielectric=X5R, Max Operating Temperature=85°C, Min Operating Temperature=-55°C, Package Quantity=2000, Tolerance=20%, Voltage=6.3V, Capacitance=47uF, Case/Package=1206, Depth=1.6mm, Height=1.6mm, Lead Free="Lead Free", Length=3.2mm, Material=Ceramic, Mount="Surface Mount", Packaging="Tape and Reel", Radiation Hardening=No, REACH SVHC="No SVHC", Termination=SMD/SMT, Thickness=0.071inch, Voltage Rating=6.3V, Voltage Rating (DC)=6.3V, Width=0.063inch
C9 C10 C12 C14 C15 C16 C23: library part CMP-2000-05452-1, "C2012X7R1A106K125AC Multilayer Ceramic Chip Capacitor, 10 uF, +/- 10%, 10 V, -55 to 125 degC, 0805 (2012 Metric), RoHS, Tape and Reel", Capacitance=10µF, Manufacturer=TDK, Operating Temperature=-55degC~125degC, Package / Case=0805(2012Metric), Package Description="2-Pin Surface Mount Device, Body 2 x 1.25 mm", Package Reference=805, PCN Part Number=MLCCPartNumberChange30/Nov/2012, Ratings=-, Standard Package=1, Temperature Coefficient=X7R, Tolerance=±10%, Voltage - Rated=10V, Applications=GeneralPurpose, Category=Capacitors, Datasheet URL=http://download.siliconexpert.com/pdfs/2015/4/21/15/54/45/779/tdk_/manual/37024850441143360mlcc_commercial_general_en.pdf, Datasheet Version=Mar-15, Family=CeramicCapacitors, Features=-, Height - Seated (Max)=-, Lead Spacing=-, Lead Style=-, Manufacturer URL=http://www.tdk.com/, Mounting Type=SurfaceMount,MLCC, Online Catalog=CSeries,GeneralPurpose, Other Names=445-6857-6, Packaging=Digi-Reel, Product Training Modules=CSeriesGeneralApplicationsSEAT,CCV,andTVCLDesignToolsGuidetoReplacinganElectrolyticCapacitorwithanMLCC, RoHS Information=RoHSCertificate-MLCC, Series=C, Size / Dimension="0.079\"Lx0.049\"W(2.00mmx1.25mm)", Thickness (Max)="0.057\"(1.45mm)"
C11: library part CMP-1665-00014-4, "ECA-1JHG471 Aluminum Electrolytic Capacitor (Radial Lead Type), 470 uF, 63 V, -55 to 105 degC, 2-Pin THD, RoHS, Bulk", Manufacturer=Panasonic, Max Operating Temperature="105 degC", Min Operating Temperature="-55 degC", Package Quantity=200, Voltage Rating="63 V", ComponentLink1Description="Manufacturer URL", ComponentLink1URL=http://www.panasonic.com/, ComponentLink2Description=Datasheet, ComponentLink2URL=http://industrial.panasonic.com/cdbs/www-data/pdf/RDF0000/ABA0000C1038.pdf, DatasheetVersion=03/2016, Height="20 mm", Lead Pitch="5 mm", Length="20 mm", Mount="Through Hole", Mounting Technology="Through Hole", PackageDescription="2-Pin Through Hole Device, Dia 12.5 mm, Body Length 20 mm", PackageReference=Radial, Packaging=Bulk, Pins=2, REACH SVHC="No SVHC", RoHSCompliant=true
C13: library part CMP-2000-06203-1, "EEEFK1C101P Aluminum Electrolytic Capacitor, 100 uF, 20%, 16 V, -55 to 105 degC, 2-Pin SMD, RoHS, Tape and Reel", Capacitance=100µF, Case Size/Dimension=Ø6.3x5.8mm, Lifetime@Temperature=2000Hrs@105°C, Manufacturer=Panasonic, Operating Temp Range=-55to+105°C, Operating Temp-Max=105°C, Package Description="2-Pin Surface Mount Device, Body 6.6 x 6.6 mm", Package Reference=EEEFK1C101P, Rated Voltage=16V, Ripple Current=240mA, Datasheet URL=http://datasheet.octopart.com/EEEFK1C101P-Panasonic-datasheet-13266987.pdf, Datasheet Version=11/2012, Impedance=0.36O, Manufacturer URL=http://www.panasonic.com/, Mounting Technology=SurfaceMount, Series=FK, Type=Can
C20 C21: library part CMP-2006-04378-1, "06035C102KAT2A", Manufacturer="AVX Interconnect / Elco", Part Number=06035C102KAT2A
D1: library part CMP-12225-000019-1, "TVS DIODE 5V 13.4V SMB", Breakdown Voltage=6.4V, Clamping Voltage=14.4V, Manufacturer=STMicroelectronics, Max Junction Temp=+150°C, Package=SMB, Peak Pulse Current=275A, Peak Pulse Power=600W, Reverse Standoff Voltage=5V, Temperature="-55°C to +150°C", Temperature Range Low=-55°C, Automotive=No, Category=Diode, ComponentLink2Description=Datasheet, ComponentLink2URL=https://www.st.com/resource/en/datasheet/smbj.pdf, Device Class L1="Circuit Protection", Device Class L2="TVS Diodes", Device Class L3=unset, Digikey Description="TVS DIODE 5V 13.4V SMB", Direction=Unidirectional, Height=2.65mm, Lead Free=Yes, Manufacturer Part Number=SMBJ5.0A-TR, Mouser Description="SMBJ Series 600 W 5 V Uni Directional SMT TVS Diode - DO-214AA", Number of Channels=1, Octopart=https://octopart.com/smbj5.0a-tr-stmicroelectronics-347079, RoHS=TRUE, Standoff Height=0.05mm, Temperature Range High=+150°C
J1: library part CONN_HEADER_20x2_SMT, "SOCKET 2X20 100-MIL STRAIGHT SMT", Function Code=DOK, MPN=210-P92-20GBEG, QCI MPN=210-P92-20GBEG, QCI Supplier=PRX, QPN=DFHD20MS161, QPN Description="CONN DIP HEADER 20P 2R MS(P2.54,H8.3)", Supplier 1=Samtec, Supplier Part Number 1=210-P92-20GBEG
J2 J3: library part CMP-196119-000001-1, "CONN RCPT USB2.0 TYPEC 16POS", Current Rating=4.25A, Manufacturer="Global Connector Technology", Package=0, Temperature="-40°C to +85°C", Temperature Range High=+85°C, Temperature Range Low=-40°C, Voltage Rating=20V, Automotive=No, Category=Conn, ComponentLink2Description=Datasheet, ComponentLink2URL=https://gct.co/files/drawings/usb4085.pdf, Conn Orientation="Right Angle", Contact Material=Gold,Nickel, Device Class L1=Connectors, Device Class L2="USB Connectors", Device Class L3=unset, Digikey Description="CONN RCPT USB2.0 TYPEC 16POS", Height=3.66mm, Is Female=yes, Lead Free=Yes, Manufacturer Part Number=USB4085-GF-A, Number of Contacts=16, Octopart=https://octopart.com/usb4085-gf-a-global+connector+technology-94773699, Pitch=0.85mm, RoHS=TRUE, Shielding=true, Usb Standard="USB 2.0"
J6 J7 J10 J11: library part CONN_03, Package=1X03, DeviceSetName=CONN_03, GateName_1=J$1, LibraryName=SparkFun-Connectors, PROD_ID=XXX-00000, SymbolName_1=CONN_03
J8 J12: "Connector", Manufacturer_Name="CUI Inc.", Mouser Part Number=490-SJ1-3523N, Arrow Part Number=SJ1-3523N, Arrow Price/Stock=https://www.arrow.com/en/products/sj1-3523n/cui-devices, Datasheet Link=https://componentsearchengine.com/Datasheets/1/SJ1-3523N.pdf, Height=5.5mm, Manufacturer_Part_Number=SJ1-3523N, Mouser Price/Stock=https://www.mouser.co.uk/ProductDetail/CUI-Devices/SJ1-3523N?qs=WyjlAZoYn50aNl0vAhb3Tg%3D%3D
J1310 J1311 J1312: library part CONN_HIROSE-DF40C-100DP-0.4V(51), "CONN HDR 100POS 0.4MM SMD GOLD", Supplier Part Number 1=H11614CT-ND, Function Code=DOK, MPN=DF40HC(3.0)-100DS-0.4V(51), QCI MPN=DF40HC(3.0)-100DS-0.4V(51), QCI Supplier=HRS, QPN=DFHSA0FR017, QPN Description="CONN HOUSING 100P 2R FR(P0.4,H2.9)", Supplier 1=Digi-Key
L1: library part NRH2412T2R2MNGH, "Inductor NRH2412T2R2MNGH", Manufacturer_Name="TAIYO YUDEN", Mouser Part Number=963-NRH2412T2R2MNGH, Arrow Part Number=NRH2412T2R2MNGH, Arrow Price/Stock=https://www.arrow.com/en/products/nrh2412t2r2mngh/taiyo-yuden, Datasheet Link=http://ds.yuden.co.jp/TYCOMPAS/ut/detail.do?productNo=NRH2412T2R2MNGH&fileName=NRH2412T2R2MNGH_SS&mode=specSheetDownload, Height=1mm, Manufacturer_Part_Number=NRH2412T2R2MNGH, Mouser Price/Stock=https://www.mouser.co.uk/ProductDetail/Taiyo-Yuden/NRH2412T2R2MNGH?qs=CNQs48zzdnqQ4uJGFCRMww%3D%3D
LED1: library part CMP-1426-00010-1, "SMD mono-color Chip LED, WL-SMCW, Super Red", Color="Super Red", Manufacturer="Wuerth Elektronik", PartNumber=150080SS75000, ComponentLink1Description="Manufacturer URL", ComponentLink1URL=http://www.we-online.com, ComponentLink2Description=Datasheet, ComponentLink2URL=http://katalog.we-online.com/led/datasheet/150080SS75000.pdf, PackageReference=0805_A
LED2: library part CMP-1426-00007-1, "SMD mono-color Chip LED, WL-SMCW, Green", Color=Green, Manufacturer="Wuerth Elektronik", PartNumber=150080GS75000, ComponentLink1Description="Manufacturer URL", ComponentLink1URL=http://www.we-online.com, ComponentLink2Description=Datasheet, ComponentLink2URL=http://katalog.we-online.com/led/datasheet/150080GS75000.pdf, PackageReference=0805_A
M1 M2 M3 M4 M5 M6: library part SERVO, Package=1X03, DeviceSetName=SERVO, GateName_1=G$1, LibraryName=SparkFun-Electromechanical, SymbolName_1=SMALL_SERVO_MOTOR
P1: library part CMP-2000-05163-1, "Male Header, Pitch 2 mm, 1 x 2 Position, Height 6.6 mm, RoHS, Tape and Reel", Manufacturer=JST, Datasheet URL=https://ciiva.com/datasheet-click-26894756?src=ciiva&sig=90099765, Datasheet Version=Dec-12, Manufacturer URL=http://www.jst.com/home2.html, No of Positions=2, Pitch=2mm, Style/Orientation=StraightHeader/Plug, Termination=Crimp, Type=ShroudedHeader
Q1: "MOSFET (N-Channel)", Manufacturer_Name=Nexperia, Mouser Part Number=771-PMF250XNEX, Arrow Part Number=PMF250XNEX, Arrow Price/Stock=https://www.arrow.com/en/products/pmf250xnex/nexperia, Datasheet Link=https://assets.nexperia.com/documents/data-sheet/PMF250XNE.pdf, Height=1.1mm, Manufacturer_Part_Number=PMF250XNEX, Mouser Price/Stock=https://www.mouser.co.uk/ProductDetail/Nexperia/PMF250XNEX?qs=gH1BdSMZm8Un6H8hz1cFsw%3D%3D
R1 R9 R12 R15 R16 R21 R22 R27 R28 R31 R32 R33 R34 R35 R36 R37 R38: library part CMP-1659-00013-4, "RC0805FR-0710KL Chip Resistor, 10 KOhm, +/- 1%, 0.125 W, -55 to 155 degC, 0805 (2012 Metric), RoHS, Tape and Reel", Manufacturer=Yageo, Max Operating Temperature="155 degC", Min Operating Temperature="-55 degC", Package Quantity=5000, Voltage Rating="150 V", ComponentLink1Description="Manufacturer URL", ComponentLink1URL=http://www.yageo.com/, ComponentLink2Description=Datasheet, ComponentLink2URL=http://www.yageo.com/documents/recent/PYu-RC_Group_51_RoHS_L_04.pdf, DatasheetVersion="Rev. 4, 02/2016", Height="0.5 mm", Length="2 mm", Mount="Surface Mount", Mounting Technology="Surface Mount", PackageDescription="2-Pin Surface Mounted Device, Body 2 x 1.25 mm", PackageReference=0805, Packaging="Tape and Reel", Pins=2, REACH SVHC="No SVHC", RoHSCompliant=true
R2 R4 R6 R7: library part CMP-2001-04024-2, "RES Thick Film, 5.1kΩ, 1%, 0.125W, 100ppm/°C, 0805 CRCW08055K10FKEA", Case Code (Imperial)=0805, Case Code (Metric)=2012, Max Operating Temperature=155°C, Max Power Dissipation=125mW, Min Operating Temperature=-55°C, Package Quantity=10, Temperature Coefficient=100ppm/°C, Tolerance=1%, Voltage Rating=150V, Case/Package=0805, Composition="Thick Film", Contact Plating=Tin, Depth=1.25mm, Features="Automotive AEC-Q200", Height=0.45mm, Lead Free="Lead Free", Length=2mm, Military Standard=Not, Mount="Surface Mount", Number of Terminations=2, Packaging="Tape and Reel", Power Rating=125mW, Radiation Hardening=No, Resistance=5.1kR, Termination=SMD/SMT, Voltage Rating (DC)=150V, Weight=0.000194oz, Width=0.049inch
R3 R8: library part CMP-2100-03671-1, "RC0805FR-071KL Chip Resistor, 1 KOhm, +/- 1%, 125 mW, -55 to 155 degC, 0805 (2012 Metric), RoHS, Tape and Reel", Case Code (Imperial)=0805, Case Code (Metric)=2012, Manufacturer=Yageo, Max Operating Temperature=155degC, Max Power Dissipation=125mW, Min Operating Temperature=-55degC, Package Description="2-Pin Surface Mounted Device, Body 2 x 1.25 mm", Package Quantity=1, Resistance=1KOhm, Temperature Coefficient=100ppm/degreesC, Tolerance=1%, Voltage Rating=150V, Case/Package=0805, Composition=ThickFilm, Datasheet URL=http://www.yageo.com/NewPortal/yageodocoutput?fileName=/pdf/R-Chip/PYu-RC_Group_51_RoHS_L_5.pdf, Datasheet Version="Rev. 5, 10/2016", Depth=1.25mm, Height=0.024inch, Lead Free=LeadFree, Length=0.079inch, Manufacturer URL=http://www.yageo.com/, Military Standard=Not, Number of Pins=2, Number of Terminations=2, Package Reference=0805, Packaging=TapeandReel, Power Rating=125mW, REACH SVHC=Unknown, RoHSCompliant=true, Termination=SMD/SMT, Voltage Rating (DC)=150V, Width=0.049inch
R5 R11 R17 R18 R25: library part CMP-2100-03681-2, "RC1206JR-070RL RES SMD 0 OHM JUMPER 1/4W 1206", Manufacturer=YAGEO, Manufacturer Part Number=RC1206JR-070RL, Package=RC1206, Power Rating=0.25W, Resistance=0Ω, Temperature="-55°C to +155°C", Temperature Coefficient=300ppm/°C, Temperature Range High=+155°C, Temperature Range Low=-55°C, Tolerance=5%, Voltage Rating=200V, Automotive=No, Category=Res, ComponentLink2Description=Datasheet, ComponentLink2URL=https://www.yageo.com/upload/media/product/productsearch/datasheet/rchip/PYu-RC_Group_51_RoHS_L_10.pdf, Composition="Thick Film", Device Class L1="Passive Components", Device Class L2=Resistors, Device Class L3="Chip SMD Resistors", Digikey Description="RES SMD 0 OHM JUMPER 1/4W 1206", Footprint Url=https://www.yageo.com/upload/website/yageo_PYu-R_Mount_10_19050818_343.pdf, Height=0.65mm, Ipc Land Pattern Name=RESC310160X55, Lead Free=Yes, Mouser Description="Resistor: thick film; SMD; 1206; 0O; 0.25W; ±5%; -55÷155°C", Octopart=https://octopart.com/rc1206jr-070rl-yageo-40025601, RoHS=TRUE, Series=RC
R10: library part CMP-2001-03667-2, "RES Thick Film, 20kΩ, 1%, 0.125W, 100ppm/°C, 0805", Case Code (Imperial)=0805, Case Code (Metric)=2012, Max Operating Temperature=155°C, Max Power Dissipation=125mW, Min Operating Temperature=-55°C, Package Quantity=10, Temperature Coefficient=100ppm/°C, Tolerance=1%, Voltage Rating=150V, Case/Package=0805, Composition="Thick Film", Contact Plating=Tin, Depth=1.25mm, Features="Automotive AEC-Q200", Height=0.45mm, Lead Free="Lead Free", Length=2mm, Military Standard=Not, Mount="Surface Mount", Number of Pins=2, Number of Terminations=2, Packaging="Tape and Reel", Power Rating=125mW, Resistance=20kR, Termination=SMD/SMT, Voltage Rating (DC)=150V, Weight=0.000194oz, Width=1.25mm, Working Voltage=150V
R19 R20 R26: library part CMP-2100-03662-2, "RC0603FR-07100KL RES SMD 100K OHM 1% 1/10W 0603", Case Code (Imperial)=0603, Case Code (Metric)=1608, Max Operating Temperature=155°C, Max Power Dissipation=100mW, Min Operating Temperature=-55°C, Resistance Tolerance=1%, Resistor Type="Thick Film", Temperature Coefficient=100ppm/°C, Voltage Rating=50V, Working Voltage=75V, Case/Package=0603, Construction=Rectangular, Depth=0.8mm, Features="Moisture Resistant", Height=0.45mm, Lead Free="Lead Free", Length=1.6mm, Military Standard=Not, Number of Pins=2, Number of Terminations=2, Packaging="Tape and Reel", Power Rating=100mW, REACH SVHC="No SVHC", Resistance=100kR, RoHS Compliant=Yes, Series=RC, Technology="THICK FILM", Termination=SMD/SMT, Tolerance=1%, Voltage Rating (DC)=50V, Width=0.8mm
R23 R24: library part CMP-2100-03662-2, "RC0603FR-07100KL RES SMD 100K OHM 1% 1/10W 0603", Case Code (Imperial)=0603, Case Code (Metric)=1608, Max Operating Temperature=155°C, Max Power Dissipation=100mW, Min Operating Temperature=-55°C, Resistance=100kR, Resistance Tolerance=1%, Resistor Type="Thick Film", Temperature Coefficient=100ppm/°C, Voltage Rating=50V, Working Voltage=75V, Case/Package=0603, Construction=Rectangular, Depth=0.8mm, Features="Moisture Resistant", Height=0.45mm, Lead Free="Lead Free", Length=1.6mm, Military Standard=Not, Number of Pins=2, Number of Terminations=2, Packaging="Tape and Reel", Power Rating=100mW, REACH SVHC="No SVHC", RoHS Compliant=Yes, Series=RC, Technology="THICK FILM", Termination=SMD/SMT, Tolerance=1%, Voltage Rating (DC)=50V, Width=0.8mm
S1: "Switch", Manufacturer_Name="Kinetic Technologies", Height=0.665mm, Manufacturer_Part_Number=KTS1681AEUZ-TR
U1: library part CMP-0063-01132-4, "IC REG BUCK 3.3V 600MA SOT23-5", Case/Package=SOT-23, Frequency=2MHz, Max Input Voltage=5.5V, Max Operating Temperature=85°C, Max Output Current=600mA, Max Output Voltage=3.3V, Min Input Voltage=2.7V, Min Operating Temperature=-40°C, Min Output Voltage=1.1V, Package Quantity=1000, Quiescent Current=16uA, Switching Frequency=2.6MHz, Contact Plating=Tin, Height=1.02mm, Lead Free="Lead Free", Length=2.92mm, Max Supply Voltage=5.5V, Min Supply Voltage=2.7V, Mount="Surface Mount", Nominal Output Voltage=3.3V, Number of Outputs=1, Number of Pins=5, Output Current=600mA, Output Type=Fixed, Output Voltage=3.3V, Packaging="Tape and Reel", REACH SVHC="No SVHC", RoHS Compliant=Yes, Termination=SMD/SMT, Width=1.6mm
U2: library part CMP-12749-000002-1, "LOAD SWITCH,SOT26,T&R,3K"
U3: library part CMP-0003-00377-3, "IC ADC 12BIT SIGMA-DELTA 10VSSOP", Case/Package=VSSOP, Max Operating Temperature=125°C, Max Power Dissipation=900uW, Max Supply Voltage=5.5V, Min Operating Temperature=-40°C, Min Supply Voltage=2V, Nominal Supply Current=150uA, Operating Supply Voltage=3.3V, Package Quantity=250, Contact Plating=Gold, Conversion Rate=3300S/s, Height=1.02mm, Integral Nonlinearity (INL)=0.5LSB, Interface=I2C, Lead Free="Lead Free", Length=3mm, Max Supply Voltage (DC)=5.5V, Min Supply Voltage (DC)=2V, Number of A/D Converters=1, Number of Bits=12, Number of Channels=4, Number of Converters=1, Number of Elements=1, Number of Inputs=4, Number of Pins=10, Packaging="Tape and Reel", Polarity=Bipolar, Power Dissipation=900uW, Radiation Hardening=No, REACH SVHC="No SVHC", Resolution=12b, Sampling Rate=3.3KS/s, Supply Type=Single, Termination=SMD/SMT, Width=3mm
U4: library part CMP-1595-00004-2, "16-Channel, 12-Bit PWM Fm+ I2C-Bus LED Controller, 2.3 to 5.5 V, -40 to 85 degC, 28-Pin TSSOP (SOT361-1), RoHS, Tape and Reel", Frequency="25000000 Hz", PartNumber=PCA9685, Supply Current Max="10 mA", Supply Voltage Max="5.5 V", Supply Voltage Min="2.3 V", Temperature Max="85 degC", Temperature Min="-40 degC", Code_JEDEC=MO-153, ComponentLink1Description="Manufacturer URL", ComponentLink1URL=http://www.nxp.com/, ComponentLink2Description=Datasheet, ComponentLink2URL=http://www.nxp.com/documents/data_sheet/PCA9685.pdf, ComponentLink3Description="Package Specification", ComponentLink3URL=http://www.nxp.com/documents/outline_drawing/sot361-1_po.pdf, DatasheetVersion="Rev. 4", Mounting Technology="Surface Mount", PackageDescription="28-Pin Small Outline Package, Body 9.7 x 4.4 mm, Pitch 0.65 mm", PackageVersion=02/2003, Packing="Tape and Reel", RoHS=TRUE
Y1: "Crystal or Oscillator", Manufacturer_Name="Diodes Inc.", Mouser Part Number=729-NX5427001Z, Arrow Part Number=NX5427001Z, Arrow Price/Stock=https://www.arrow.com/en/products/nx5427001z/diodes-incorporated, Datasheet Link=https://www.mouser.com/datasheet/2/115/X5427001Z-1536397.pdf, Height=1.35mm, Manufacturer_Part_Number=NX5427001Z, Mouser Price/Stock=https://www.mouser.co.uk/ProductDetail/Diodes-Incorporated/NX5427001Z/?qs=wUXugUrL1qyVL74uDcbXrg%3D%3D

## Via types
v1: diameter 18, hole 8, Top Layer to Bottom Layer, 168 vias
v2: diameter 35, hole 20, Top Layer to Bottom Layer, 81 vias

## Nets (pads, with @x,y where several pads share a name; then routed paths per layer and width w, separated by ;. In a path a pad name is that pad's centre, name@x,y a point inside that pad or via, vN(x,y) a via of type N, cw(c..) or ccw(c..) an arc to the next point about the centre after c; other vN are vias at no path point)
3V3: C2.1 C10.2 C19.2 C22.2 J1.1 J1.17 J6.3 J10.3 L1.2 R12.2 R16.1 R19.2 R20.2 R21.1 R22.1 R27.1 R28.1 R31.1 R32.1 R35.1 R36.1 TP7.1 U1.4 U3.8 U4.28 Y1.6 | length 4971.6
  Top Layer w10: R36.1@1830,3135.43 1930,3035.43 1930,2870 J1.17@1880,2820
  Top Layer w12: C19.2@3510,2322.44 C19.2@3525.19,2307.26 ; 3552.74,2307.26 3562.31,2297.69 3597.98,2297.69 U3.8@3598.07,2297.6
  Top Layer w13: C19.2@3525.19,2307.26 3552.74,2307.26
  Top Layer w18: R28.1@760,2255.43 760,2305 v2(762,2307) ; R27.1@900,2255.43 903,2258.43 v2(903,2305) ; R31.1@1240,3135.43 1287.57,3183 1413,3183 ; R32.1@1440,3135.43 1440,3156 1413,3183 ; R35.1@1630,3135.43 1582.43,3183 ; R36.1@1830,3135.43 1830,3168 1815,3183 1582.43,3183 ; TP7.1@4327,2451 4264,2514 4264,2772.12 4261.06,2775.06 L1.2@4261.06,2784.85 4261.06,2843.06 4269,2851 4385.04,2851 U1.4@4408.64,2827.4 ; 1413,3183 1582.43,3183
  Top Layer w20: v2(815,2050) 815,1982.23 803.28,1970.51 794.96,1970.51 786.26,1961.81 C10.2@786.26,1950 826.98,1909.28 U4.28@826.98,1865.28 ; R22.1@1926,1911.87 1926,1923 v2(1969,1966) 2016,1919 R21.1@2016,1911.87 ; v2(3410,2340) 3425,2325 3507.44,2325 C19.2@3510,2322.44 ; v1(3660,2100) R12.2@3709.57,2100
  Top Layer w35: v2(3146,2325) 3148.54,2322.46 R16.1@3214.01,2322.46 ; v2(3645,1929) 3700,1874 J6.3@3700,1175 ; v2(4137,1933) 4137,1408 J10.3@4390,1155
  Bottom Layer w30: v2(762,2307) 762,2260 815,2207 v2(815,2050)
  Bottom Layer w35: v2(2547,2068) 2549,2066 2682,2066 2710.59,2037.41 C22.2@2710.59,2010 ; Y1.6@2753.82,1875 2753.82,1966.77 C22.2@2710.59,2010 ; R19.2@2801.54,2065 R20.2@2801.54,2005 2796.54,2010 C22.2@2710.59,2010
  other v1: 4210,2560 4240,2560 4270,2560 4300,2560 4210,2590 4240,2590 4270,2590 4300,2590 4210,2620 4240,2620 4270,2620 4210,2650 4240,2650 4270,2650 4210,2680 4240,2680 4210,2710
5VSYS: C6.1 C7.1 C8.1 C9.2 C14.2 C17.1 C20.2 C21.1 C23.2 C24.2 C25.2 D1.1 J1.2 J1.4 J1312.93 J1312.94 J1312.95 J1312.96 J1312.97 J1312.98 J1312.99 J1312.100 P1.1 R5.2 R9.2 R11.1 R26.2 S1.A2 S1.A3 S1.B2 TP6.1 U1.1 U2.1 U2.3 | length 1255.5
  Top Layer w18: R26.2@4564.46,2897 4596,2897 v1(4610,2883)
  Top Layer w20: v2(410,2230) 445.59,2194.41 C17.1@445.59,2180 450.1,2175.49 C14.2@450.1,2086.16 ; v2(480,2020) 446.26,2053.74 C14.2@446.26,2090 C14.2@450.1,2086.16 ; U2.3@593.32,2086.16 595,2084.47 595,2008 585,1998 536,1998 518.51,2015.49 U2.1@518.51,2086.16 C14.2@450.1,2086.16
  Top Layer w25: P1.1@3163.58,1895.63 3291.22,1895.63 C20.2@3300,1904.41 3301.18,1905.59 C21.1@3350,1905.59 v2(3350,1954)
  Top Layer w40: v2(910,2810) R11.1@812.99,2810 922.99,2920 J1.2@1080,2920
  other v1: 1440,1485 1440,1545 4520,2570 4550,2570 4580,2570 4610,2570 4640,2570 4670,2570 4520,2600 4550,2600 4580,2600 4610,2600 4640,2600 4670,2600 4610,2630 4640,2630 4670,2630 4610,2660 4640,2660 4670,2660 5220,3010 5260,3010 5300,3010 5450,3010 5490,3010 5530,3010 5220,3050 5260,3050 5300,3050 5450,3050 5490,3050 5530,3050 5350,3070 5400,3070 5260,3090 5300,3090 5450,3090 5490,3090 5350,3110 5400,3110
  other v2: 1485,1485 1545,1485 1605,1485 1485,1545 1545,1545 1605,1545 1665,1545 1485,1605 1545,1605 1605,1605 1665,1605 5025,1995 5085,1995 5145,1995 5205,1995 5265,1995 5025,2055 5085,2055 5145,2055 5205,2055 5265,2055 740,2060 740,2110 5085,2115 5145,2115 5205,2115 5145,2175
DCDC_3V3: J1310.84 J1310.86 J1310.88 J1310.90 TP1.1 | length 592.3
  Top Layer w10: J1310.84@2741.73,1542.91 J1310.86@2741.73,1527.17 J1310.88@2741.73,1511.42 J1310.90@2741.73,1495.67 2715.67,1495.67 2708,1488 2708,1331 2899,1140 TP1.1@2980,1140
ECSPI1_MISO: J1.21 J1312.5 | length 1703.5
  Top Layer w10: J1312.5@1355.12,2157.09 1373.9,2157.09 1381.02,2149.96 2183.81,2149.96 2304,2270.15 v2(2304,2330) ; J1.21@2080,2820 2162,2738 2258,2738 2307.61,2688.39 v2(2307.61,2676)
  Bottom Layer w10: v2(2304,2330) 2304,2635 2304,2672.39 v2(2307.61,2676)
ECSPI1_MOSI: J1.19 J1312.7 | length 1938.6
  Top Layer w10: J1312.7@1355.12,2141.34 1369.85,2141.34 1391.22,2119.96 2196.24,2119.96 2334,2257.72 2334,2320 v2(2344,2330) ; J1.19@1980,2820 2166,2634 2319,2634 2347.61,2662.61 v2(2347.61,2676)
  Bottom Layer w10: v2(2344,2330) 2344,2672.39 v2(2347.61,2676)
ECSPI1_SCLK: J1.23 J1312.4
ECSPI1_SS0: J1.24 J1312.8
ECSPI1_SS1: J1.26 J1310.6 | length 974.1
  Top Layer w8: J1.26@2280,2920 2280,2902.14 2296.65,2885.49 2296.65,2883.35 2330,2850 2330,2790 v1(2430,2690) ; v1(2706,2316) 2703,2313 2703,2168 2713.91,2157.09 J1310.6@2741.73,2157.09
  Bottom Layer w8: v1(2430,2690) 2430,2590 2704,2316 v1(2706,2316)